# EAGLE board T5400_Barometer_Breakout-Panel-v10 (EAGLE 6.5.0), part 1 of 2
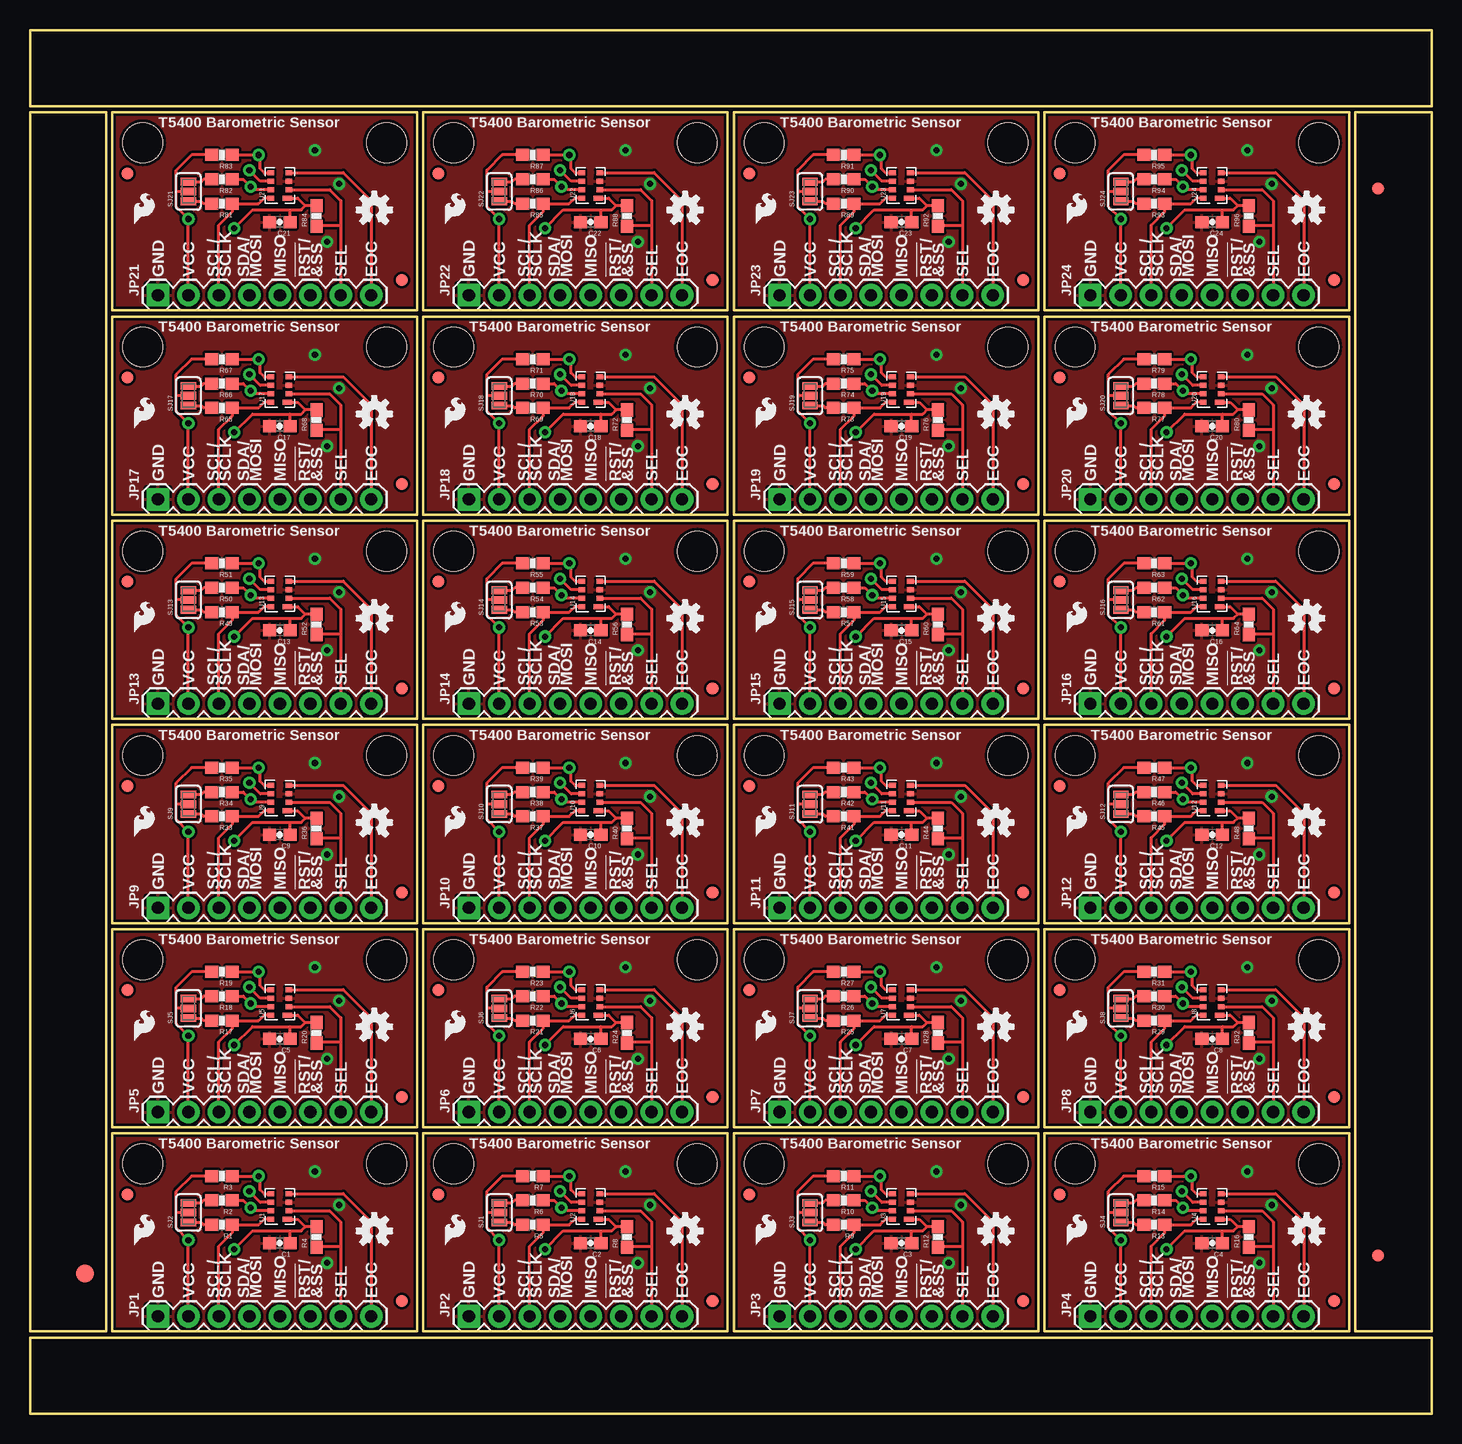
[diagram p0: board, top side]
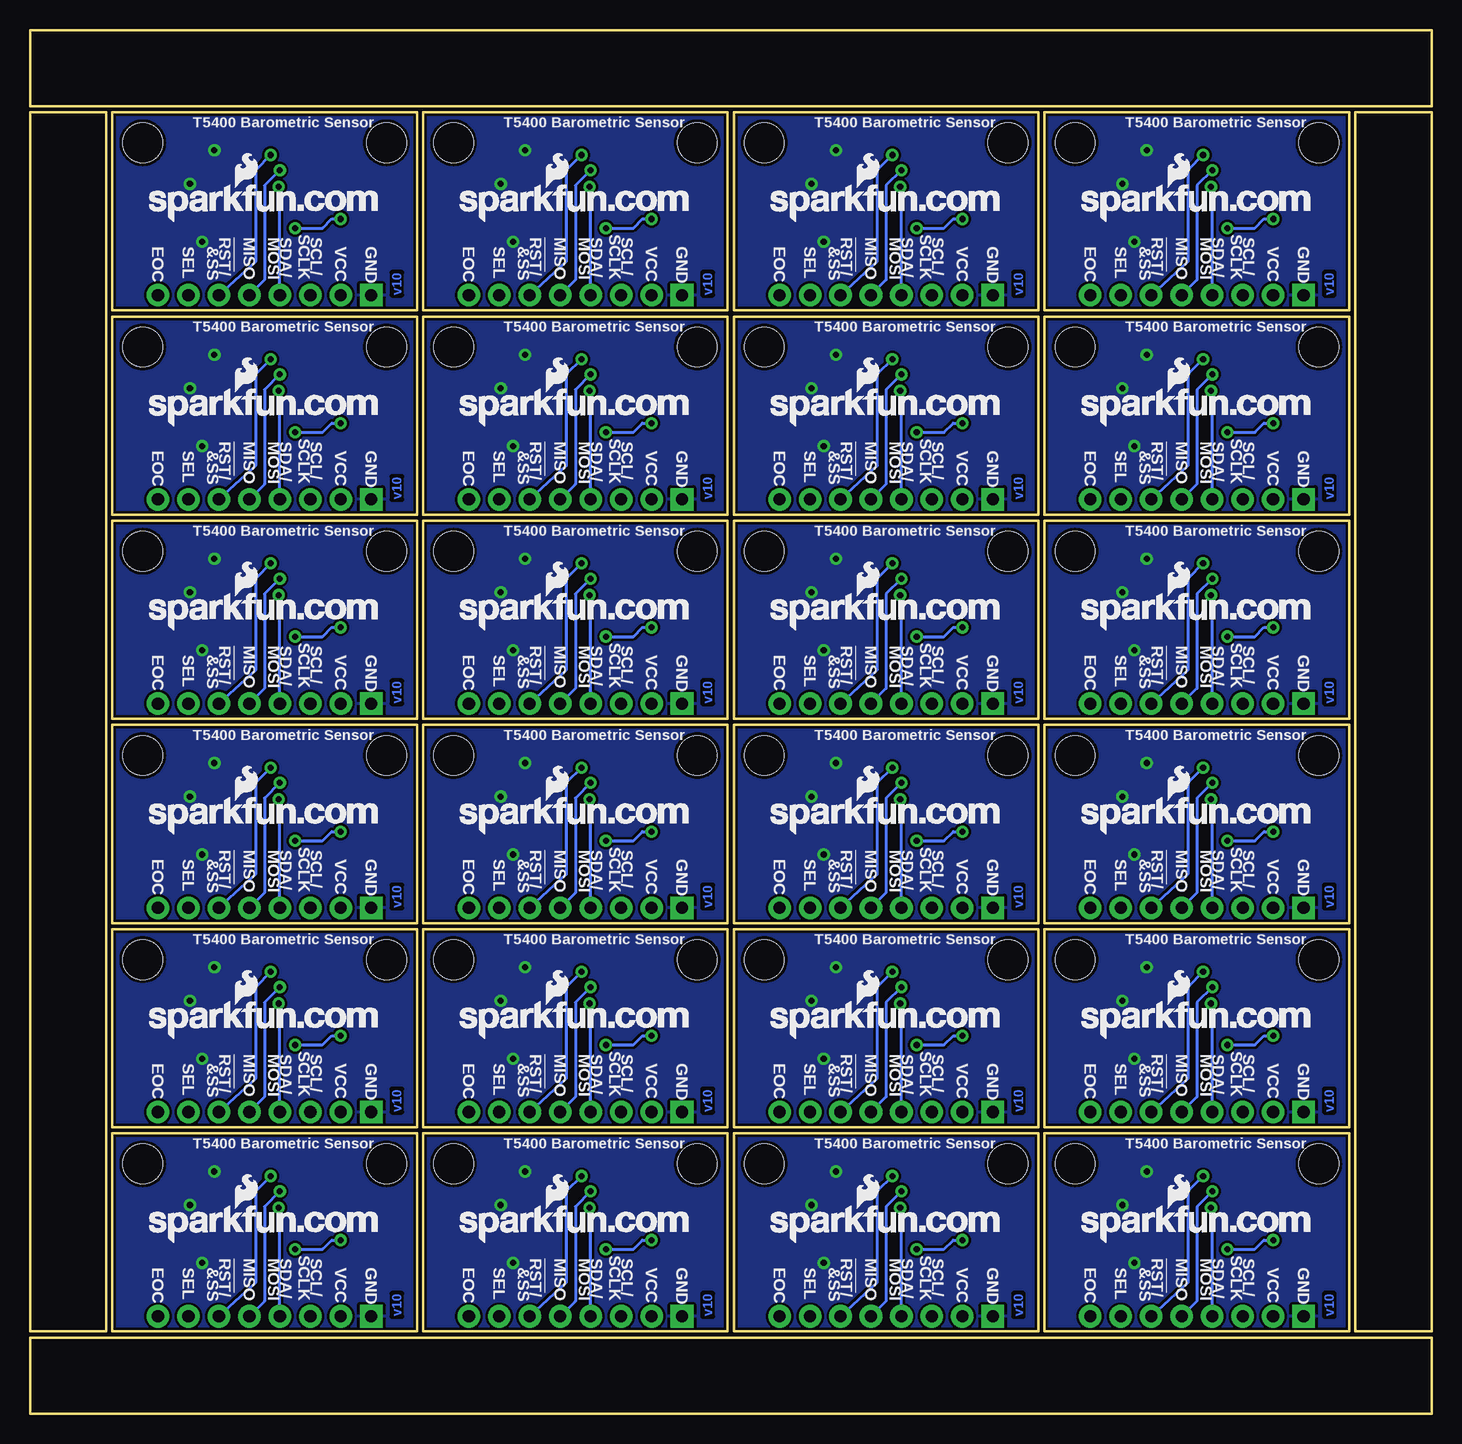
[diagram p1: board, bottom side, seen from below]

Size 116.84 x 115.32 mm. Coordinates in mm from the lower left corner, seen from the top.
Outline: 6.86,6.86 32.26,6.86 32.26,23.37 6.86,23.37 6.86,6.86
Outline: 32.77,6.86 58.17,6.86 58.17,23.37 32.77,23.37 32.77,6.86
Outline: 58.67,6.86 84.07,6.86 84.07,23.37 58.67,23.37 58.67,6.86
Outline: 84.58,6.86 109.98,6.86 109.98,23.37 84.58,23.37 84.58,6.86
Outline: 6.86,23.88 32.26,23.88 32.26,40.39 6.86,40.39 6.86,23.88
Outline: 32.77,23.88 58.17,23.88 58.17,40.39 32.77,40.39 32.77,23.88
Outline: 58.67,23.88 84.07,23.88 84.07,40.39 58.67,40.39 58.67,23.88
Outline: 84.58,23.88 109.98,23.88 109.98,40.39 84.58,40.39 84.58,23.88
Outline: 6.86,40.89 32.26,40.89 32.26,57.4 6.86,57.4 6.86,40.89
Outline: 32.77,40.89 58.17,40.89 58.17,57.4 32.77,57.4 32.77,40.89
Outline: 58.67,40.89 84.07,40.89 84.07,57.4 58.67,57.4 58.67,40.89
Outline: 84.58,40.89 109.98,40.89 109.98,57.4 84.58,57.4 84.58,40.89
Outline: 6.86,57.91 32.26,57.91 32.26,74.42 6.86,74.42 6.86,57.91
Outline: 32.77,57.91 58.17,57.91 58.17,74.42 32.77,74.42 32.77,57.91
Outline: 58.67,57.91 84.07,57.91 84.07,74.42 58.67,74.42 58.67,57.91
Outline: 84.58,57.91 109.98,57.91 109.98,74.42 84.58,74.42 84.58,57.91
Outline: 6.86,74.93 32.26,74.93 32.26,91.44 6.86,91.44 6.86,74.93
Outline: 32.77,74.93 58.17,74.93 58.17,91.44 32.77,91.44 32.77,74.93
Outline: 58.67,74.93 84.07,74.93 84.07,91.44 58.67,91.44 58.67,74.93
Outline: 84.58,74.93 109.98,74.93 109.98,91.44 84.58,91.44 84.58,74.93
Outline: 6.86,91.95 32.26,91.95 32.26,108.46 6.86,108.46 6.86,91.95
Outline: 32.77,91.95 58.17,91.95 58.17,108.46 32.77,108.46 32.77,91.95
Outline: 58.67,91.95 84.07,91.95 84.07,108.46 58.67,108.46 58.67,91.95
Outline: 84.58,91.95 109.98,91.95 109.98,108.46 84.58,108.46 84.58,91.95
Outline: 6.35,6.86 6.35,108.46 0,108.46 0,6.86 6.35,6.86
Outline: 0,0 116.84,0 116.84,6.35 0,6.35 0,0
Outline: 116.84,6.86 116.84,108.46 110.49,108.46 110.49,6.86 116.84,6.86
Outline: 116.84,115.32 0,115.32 0,108.97 116.84,108.97 116.84,115.32
Copper layers (1*16): Top 0.035mm / dielectric 1.5mm / Bottom 0.035mm
Design rules "default": minimum track width 7mil, minimum drill 15mil, track to track 8mil, track to pad 8mil, pad to pad 8mil, via to via 8mil, smd to smd 8mil, copper to edge 8mil, drill to drill 8mil, minimum pad ring 12mil, minimum via ring 10mil, stop-mask expansion 4mil, vias tented up to drill 20mil, thermal gap 10mil
tRestrict: area 20.6,15.7 to 20.8,16.5; area 20.6,16.5 to 21.1,17.3; area 46.5,15.7 to 46.7,16.5; area 46.5,16.5 to 47,17.3; area 72.4,15.7 to 72.6,16.5; area 72.4,16.5 to 72.9,17.3; area 98.3,15.7 to 98.6,16.5; area 98.3,16.5 to 98.8,17.3; area 20.6,32.8 to 20.8,33.5; area 20.6,33.5 to 21.1,34.3; area 46.5,32.8 to 46.7,33.5; area 46.5,33.5 to 47,34.3; area 72.4,32.8 to 72.6,33.5; area 72.4,33.5 to 72.9,34.3; area 98.3,32.8 to 98.6,33.5; area 98.3,33.5 to 98.8,34.3; area 20.6,49.8 to 20.8,50.5; area 20.6,50.5 to 21.1,51.3; area 46.5,49.8 to 46.7,50.5; area 46.5,50.5 to 47,51.3; area 72.4,49.8 to 72.6,50.5; area 72.4,50.5 to 72.9,51.3; area 98.3,49.8 to 98.6,50.5; area 98.3,50.5 to 98.8,51.3; area 20.6,66.8 to 20.8,67.6; area 20.6,67.6 to 21.1,68.3; area 46.5,66.8 to 46.7,67.6; area 46.5,67.6 to 47,68.3; area 72.4,66.8 to 72.6,67.6; area 72.4,67.6 to 72.9,68.3; area 98.3,66.8 to 98.6,67.6; area 98.3,67.6 to 98.8,68.3; area 20.6,83.8 to 20.8,84.6; area 20.6,84.6 to 21.1,85.3; area 46.5,83.8 to 46.7,84.6; area 46.5,84.6 to 47,85.3; area 72.4,83.8 to 72.6,84.6; area 72.4,84.6 to 72.9,85.3; area 98.3,83.8 to 98.6,84.6; area 98.3,84.6 to 98.8,85.3; area 20.6,100.8 to 20.8,101.6; area 20.6,101.6 to 21.1,102.4; area 46.5,100.8 to 46.7,101.6; area 46.5,101.6 to 47,102.4; area 72.4,100.8 to 72.6,101.6; area 72.4,101.6 to 72.9,102.4; area 98.3,100.8 to 98.6,101.6; area 98.3,101.6 to 98.8,102.4

## Footprints (pad centres in the part's own frame; a part is rotated, then mirrored left to right if it is on the bottom)
0603-CAP = smd 1.1 x 1: 1 -0.85,0; 2 0.85,0
FIDUCIAL-1.5X3 = smd 1.5 x 1.5: 1 0,0
FIDUCIAL-1X2 = smd 1 x 1: 1 0,0
1X08 = drill 1.016 pad 1.88 square: 1 0,0 | drill 1.016 pad 1.88: 2 2.54,0; 3 5.08,0; 4 7.62,0; 5 10.16,0; 6 12.7,0; 7 15.24,0; 8 17.78,0
0603-RES = smd 1.1 x 1: 1 -0.85,0; 2 0.85,0
SJ_3_PASTE1&2&3 = smd 0.635 x 1.27: 1 -0.813,0; 2 0,0; 3 0.813,0
STAND-OFF = hole 3.302: 0,0
T5400 = smd 0.42 x 0.8: 1 -1.065,-0.625 | smd 0.42 x 0.55: 2 -0.355,-0.75; 3 0.355,-0.75; 4 1.065,-0.75; 5 1.065,0.75; 6 0.355,0.75; 7 -0.355,0.75; 8 -1.065,0.75

## Placement (x,y rotation side)
C1  .1uF  [0603-CAP]  20.83,14.22 180 top
C2  .1uF  [0603-CAP]  46.74,14.22 180 top
C3  .1uF  [0603-CAP]  72.64,14.22 180 top
C4  .1uF  [0603-CAP]  98.55,14.22 180 top
C5  .1uF  [0603-CAP]  20.83,31.24 180 top
C6  .1uF  [0603-CAP]  46.74,31.24 180 top
C7  .1uF  [0603-CAP]  72.64,31.24 180 top
C8  .1uF  [0603-CAP]  98.55,31.24 180 top
C9  .1uF  [0603-CAP]  20.83,48.26 180 top
C10  .1uF  [0603-CAP]  46.74,48.26 180 top
C11  .1uF  [0603-CAP]  72.64,48.26 180 top
C12  .1uF  [0603-CAP]  98.55,48.26 180 top
C13  .1uF  [0603-CAP]  20.83,65.28 180 top
C14  .1uF  [0603-CAP]  46.74,65.28 180 top
C15  .1uF  [0603-CAP]  72.64,65.28 180 top
C16  .1uF  [0603-CAP]  98.55,65.28 180 top
C17  .1uF  [0603-CAP]  20.83,82.3 180 top
C18  .1uF  [0603-CAP]  46.74,82.3 180 top
C19  .1uF  [0603-CAP]  72.64,82.3 180 top
C20  .1uF  [0603-CAP]  98.55,82.3 180 top
C21  .1uF  [0603-CAP]  20.83,99.31 180 top
C22  .1uF  [0603-CAP]  46.74,99.31 180 top
C23  .1uF  [0603-CAP]  72.64,99.31 180 top
C24  .1uF  [0603-CAP]  98.55,99.31 180 top
E$1  [FIDUCIAL-1.5X3]  4.57,11.68 0 top
E$4  [FIDUCIAL-1X2]  112.39,13.21 0 top
E$5  [FIDUCIAL-1X2]  112.39,102.11 180 top
FID1  FIDUCIAL1X2  [FIDUCIAL-1X2]  8.13,18.29 0 top
FID2  FIDUCIAL1X2  [FIDUCIAL-1X2]  30.99,9.4 0 top
FID3  FIDUCIAL1X2  [FIDUCIAL-1X2]  34.04,18.29 0 top
FID4  FIDUCIAL1X2  [FIDUCIAL-1X2]  56.9,9.4 0 top
FID5  FIDUCIAL1X2  [FIDUCIAL-1X2]  59.94,18.29 0 top
FID6  FIDUCIAL1X2  [FIDUCIAL-1X2]  82.8,9.4 0 top
FID7  FIDUCIAL1X2  [FIDUCIAL-1X2]  85.85,18.29 0 top
FID8  FIDUCIAL1X2  [FIDUCIAL-1X2]  108.71,9.4 0 top
FID9  FIDUCIAL1X2  [FIDUCIAL-1X2]  8.13,35.31 0 top
FID10  FIDUCIAL1X2  [FIDUCIAL-1X2]  30.99,26.42 0 top
FID11  FIDUCIAL1X2  [FIDUCIAL-1X2]  34.04,35.31 0 top
FID12  FIDUCIAL1X2  [FIDUCIAL-1X2]  56.9,26.42 0 top
FID13  FIDUCIAL1X2  [FIDUCIAL-1X2]  59.94,35.31 0 top
FID14  FIDUCIAL1X2  [FIDUCIAL-1X2]  82.8,26.42 0 top
FID15  FIDUCIAL1X2  [FIDUCIAL-1X2]  85.85,35.31 0 top
FID16  FIDUCIAL1X2  [FIDUCIAL-1X2]  108.71,26.42 0 top
FID17  FIDUCIAL1X2  [FIDUCIAL-1X2]  8.13,52.32 0 top
FID18  FIDUCIAL1X2  [FIDUCIAL-1X2]  30.99,43.43 0 top
FID19  FIDUCIAL1X2  [FIDUCIAL-1X2]  34.04,52.32 0 top
FID20  FIDUCIAL1X2  [FIDUCIAL-1X2]  56.9,43.43 0 top
FID21  FIDUCIAL1X2  [FIDUCIAL-1X2]  59.94,52.32 0 top
FID22  FIDUCIAL1X2  [FIDUCIAL-1X2]  82.8,43.43 0 top
FID23  FIDUCIAL1X2  [FIDUCIAL-1X2]  85.85,52.32 0 top
FID24  FIDUCIAL1X2  [FIDUCIAL-1X2]  108.71,43.43 0 top
FID25  FIDUCIAL1X2  [FIDUCIAL-1X2]  8.13,69.34 0 top
FID26  FIDUCIAL1X2  [FIDUCIAL-1X2]  30.99,60.45 0 top
FID27  FIDUCIAL1X2  [FIDUCIAL-1X2]  34.04,69.34 0 top
FID28  FIDUCIAL1X2  [FIDUCIAL-1X2]  56.9,60.45 0 top
FID29  FIDUCIAL1X2  [FIDUCIAL-1X2]  59.94,69.34 0 top
FID30  FIDUCIAL1X2  [FIDUCIAL-1X2]  82.8,60.45 0 top
FID31  FIDUCIAL1X2  [FIDUCIAL-1X2]  85.85,69.34 0 top
FID32  FIDUCIAL1X2  [FIDUCIAL-1X2]  108.71,60.45 0 top
FID33  FIDUCIAL1X2  [FIDUCIAL-1X2]  8.13,86.36 0 top
FID34  FIDUCIAL1X2  [FIDUCIAL-1X2]  30.99,77.47 0 top
FID35  FIDUCIAL1X2  [FIDUCIAL-1X2]  34.04,86.36 0 top
FID36  FIDUCIAL1X2  [FIDUCIAL-1X2]  56.9,77.47 0 top
FID37  FIDUCIAL1X2  [FIDUCIAL-1X2]  59.94,86.36 0 top
FID38  FIDUCIAL1X2  [FIDUCIAL-1X2]  82.8,77.47 0 top
FID39  FIDUCIAL1X2  [FIDUCIAL-1X2]  85.85,86.36 0 top
FID40  FIDUCIAL1X2  [FIDUCIAL-1X2]  108.71,77.47 0 top
FID41  FIDUCIAL1X2  [FIDUCIAL-1X2]  8.13,103.38 0 top
FID42  FIDUCIAL1X2  [FIDUCIAL-1X2]  30.99,94.49 0 top
FID43  FIDUCIAL1X2  [FIDUCIAL-1X2]  34.04,103.38 0 top
FID44  FIDUCIAL1X2  [FIDUCIAL-1X2]  56.9,94.49 0 top
FID45  FIDUCIAL1X2  [FIDUCIAL-1X2]  59.94,103.38 0 top
FID46  FIDUCIAL1X2  [FIDUCIAL-1X2]  82.8,94.49 0 top
FID47  FIDUCIAL1X2  [FIDUCIAL-1X2]  85.85,103.38 0 top
FID48  FIDUCIAL1X2  [FIDUCIAL-1X2]  108.71,94.49 0 top
JP1  [1X08]  10.67,8.13 0 top
JP2  [1X08]  36.58,8.13 0 top
JP3  [1X08]  62.48,8.13 0 top
JP4  [1X08]  88.39,8.13 0 top
JP5  [1X08]  10.67,25.15 0 top
JP6  [1X08]  36.58,25.15 0 top
JP7  [1X08]  62.48,25.15 0 top
JP8  [1X08]  88.39,25.15 0 top
JP9  [1X08]  10.67,42.16 0 top
JP10  [1X08]  36.58,42.16 0 top
JP11  [1X08]  62.48,42.16 0 top
JP12  [1X08]  88.39,42.16 0 top
JP13  [1X08]  10.67,59.18 0 top
JP14  [1X08]  36.58,59.18 0 top
JP15  [1X08]  62.48,59.18 0 top
JP16  [1X08]  88.39,59.18 0 top
JP17  [1X08]  10.67,76.2 0 top
JP18  [1X08]  36.58,76.2 0 top
JP19  [1X08]  62.48,76.2 0 top
JP20  [1X08]  88.39,76.2 0 top
JP21  [1X08]  10.67,93.22 0 top
JP22  [1X08]  36.58,93.22 0 top
JP23  [1X08]  62.48,93.22 0 top
JP24  [1X08]  88.39,93.22 0 top
LOGO1  LOGO-SFENEW  [SFE-NEW-WEBLOGO]  29.21,14.22 0 bottom
LOGO2  OSHW-LOGOS  [OSHW-LOGO-S]  28.7,15.24 0 top
LOGO3  SFE_LOGO_FLAME.1_INCH  [SFE_LOGO_FLAME_.1]  8.38,13.72 0 top
LOGO4  OSHW-LOGOS  [OSHW-LOGO-S]  54.61,15.24 0 top
LOGO5  LOGO-SFENEW  [SFE-NEW-WEBLOGO]  55.12,14.22 0 bottom
LOGO6  SFE_LOGO_FLAME.1_INCH  [SFE_LOGO_FLAME_.1]  34.29,13.72 0 top
LOGO7  OSHW-LOGOS  [OSHW-LOGO-S]  80.52,15.24 0 top
LOGO8  LOGO-SFENEW  [SFE-NEW-WEBLOGO]  81.03,14.22 0 bottom
LOGO9  SFE_LOGO_FLAME.1_INCH  [SFE_LOGO_FLAME_.1]  60.2,13.72 0 top
LOGO10  OSHW-LOGOS  [OSHW-LOGO-S]  106.43,15.24 0 top
LOGO11  LOGO-SFENEW  [SFE-NEW-WEBLOGO]  106.93,14.22 0 bottom
LOGO12  SFE_LOGO_FLAME.1_INCH  [SFE_LOGO_FLAME_.1]  86.11,13.72 0 top
LOGO13  OSHW-LOGOS  [OSHW-LOGO-S]  28.7,32.26 0 top
LOGO14  LOGO-SFENEW  [SFE-NEW-WEBLOGO]  29.21,31.24 0 bottom
LOGO15  SFE_LOGO_FLAME.1_INCH  [SFE_LOGO_FLAME_.1]  8.38,30.73 0 top
LOGO16  OSHW-LOGOS  [OSHW-LOGO-S]  54.61,32.26 0 top
LOGO17  LOGO-SFENEW  [SFE-NEW-WEBLOGO]  55.12,31.24 0 bottom
LOGO18  SFE_LOGO_FLAME.1_INCH  [SFE_LOGO_FLAME_.1]  34.29,30.73 0 top
LOGO19  OSHW-LOGOS  [OSHW-LOGO-S]  80.52,32.26 0 top
LOGO20  LOGO-SFENEW  [SFE-NEW-WEBLOGO]  81.03,31.24 0 bottom
LOGO21  SFE_LOGO_FLAME.1_INCH  [SFE_LOGO_FLAME_.1]  60.2,30.73 0 top
LOGO22  OSHW-LOGOS  [OSHW-LOGO-S]  106.43,32.26 0 top
LOGO23  LOGO-SFENEW  [SFE-NEW-WEBLOGO]  106.93,31.24 0 bottom
LOGO24  SFE_LOGO_FLAME.1_INCH  [SFE_LOGO_FLAME_.1]  86.11,30.73 0 top
LOGO25  OSHW-LOGOS  [OSHW-LOGO-S]  28.7,49.28 0 top
LOGO26  LOGO-SFENEW  [SFE-NEW-WEBLOGO]  29.21,48.26 0 bottom
LOGO27  SFE_LOGO_FLAME.1_INCH  [SFE_LOGO_FLAME_.1]  8.38,47.75 0 top
LOGO28  OSHW-LOGOS  [OSHW-LOGO-S]  54.61,49.28 0 top
LOGO29  LOGO-SFENEW  [SFE-NEW-WEBLOGO]  55.12,48.26 0 bottom
LOGO30  SFE_LOGO_FLAME.1_INCH  [SFE_LOGO_FLAME_.1]  34.29,47.75 0 top
LOGO31  OSHW-LOGOS  [OSHW-LOGO-S]  80.52,49.28 0 top
LOGO32  LOGO-SFENEW  [SFE-NEW-WEBLOGO]  81.03,48.26 0 bottom
LOGO33  SFE_LOGO_FLAME.1_INCH  [SFE_LOGO_FLAME_.1]  60.2,47.75 0 top
LOGO34  OSHW-LOGOS  [OSHW-LOGO-S]  106.43,49.28 0 top
LOGO35  LOGO-SFENEW  [SFE-NEW-WEBLOGO]  106.93,48.26 0 bottom
LOGO36  SFE_LOGO_FLAME.1_INCH  [SFE_LOGO_FLAME_.1]  86.11,47.75 0 top
LOGO37  OSHW-LOGOS  [OSHW-LOGO-S]  28.7,66.29 0 top
LOGO38  LOGO-SFENEW  [SFE-NEW-WEBLOGO]  29.21,65.28 0 bottom
LOGO39  SFE_LOGO_FLAME.1_INCH  [SFE_LOGO_FLAME_.1]  8.38,64.77 0 top
LOGO40  OSHW-LOGOS  [OSHW-LOGO-S]  54.61,66.29 0 top
LOGO41  LOGO-SFENEW  [SFE-NEW-WEBLOGO]  55.12,65.28 0 bottom
LOGO42  SFE_LOGO_FLAME.1_INCH  [SFE_LOGO_FLAME_.1]  34.29,64.77 0 top
LOGO43  OSHW-LOGOS  [OSHW-LOGO-S]  80.52,66.29 0 top
LOGO44  LOGO-SFENEW  [SFE-NEW-WEBLOGO]  81.03,65.28 0 bottom
LOGO45  SFE_LOGO_FLAME.1_INCH  [SFE_LOGO_FLAME_.1]  60.2,64.77 0 top
LOGO46  OSHW-LOGOS  [OSHW-LOGO-S]  106.43,66.29 0 top
LOGO47  LOGO-SFENEW  [SFE-NEW-WEBLOGO]  106.93,65.28 0 bottom
LOGO48  SFE_LOGO_FLAME.1_INCH  [SFE_LOGO_FLAME_.1]  86.11,64.77 0 top
LOGO49  OSHW-LOGOS  [OSHW-LOGO-S]  28.7,83.31 0 top
LOGO50  LOGO-SFENEW  [SFE-NEW-WEBLOGO]  29.21,82.3 0 bottom
LOGO51  SFE_LOGO_FLAME.1_INCH  [SFE_LOGO_FLAME_.1]  8.38,81.79 0 top
LOGO52  OSHW-LOGOS  [OSHW-LOGO-S]  54.61,83.31 0 top
LOGO53  LOGO-SFENEW  [SFE-NEW-WEBLOGO]  55.12,82.3 0 bottom
LOGO54  SFE_LOGO_FLAME.1_INCH  [SFE_LOGO_FLAME_.1]  34.29,81.79 0 top
LOGO55  OSHW-LOGOS  [OSHW-LOGO-S]  80.52,83.31 0 top
LOGO56  LOGO-SFENEW  [SFE-NEW-WEBLOGO]  81.03,82.3 0 bottom
LOGO57  SFE_LOGO_FLAME.1_INCH  [SFE_LOGO_FLAME_.1]  60.2,81.79 0 top
LOGO58  OSHW-LOGOS  [OSHW-LOGO-S]  106.43,83.31 0 top
LOGO59  LOGO-SFENEW  [SFE-NEW-WEBLOGO]  106.93,82.3 0 bottom
LOGO60  SFE_LOGO_FLAME.1_INCH  [SFE_LOGO_FLAME_.1]  86.11,81.79 0 top
LOGO61  OSHW-LOGOS  [OSHW-LOGO-S]  28.7,100.33 0 top
LOGO62  LOGO-SFENEW  [SFE-NEW-WEBLOGO]  29.21,99.31 0 bottom
LOGO63  SFE_LOGO_FLAME.1_INCH  [SFE_LOGO_FLAME_.1]  8.38,98.81 0 top
LOGO64  OSHW-LOGOS  [OSHW-LOGO-S]  54.61,100.33 0 top
LOGO65  LOGO-SFENEW  [SFE-NEW-WEBLOGO]  55.12,99.31 0 bottom
LOGO66  SFE_LOGO_FLAME.1_INCH  [SFE_LOGO_FLAME_.1]  34.29,98.81 0 top
LOGO67  OSHW-LOGOS  [OSHW-LOGO-S]  80.52,100.33 0 top
LOGO68  LOGO-SFENEW  [SFE-NEW-WEBLOGO]  81.03,99.31 0 bottom
LOGO69  SFE_LOGO_FLAME.1_INCH  [SFE_LOGO_FLAME_.1]  60.2,98.81 0 top
LOGO70  OSHW-LOGOS  [OSHW-LOGO-S]  106.43,100.33 0 top
LOGO71  LOGO-SFENEW  [SFE-NEW-WEBLOGO]  106.93,99.31 0 bottom
LOGO72  SFE_LOGO_FLAME.1_INCH  [SFE_LOGO_FLAME_.1]  86.11,98.81 0 top
R1  4.7k  [0603-RES]  16,15.75 180 top
R2  4.7k  [0603-RES]  16,17.78 180 top
R3  10k  [0603-RES]  16,19.81 180 top
R4  10k  [0603-RES]  23.88,14.73 90 top
R5  4.7k  [0603-RES]  41.91,15.75 180 top
R6  4.7k  [0603-RES]  41.91,17.78 180 top
R7  10k  [0603-RES]  41.91,19.81 180 top
R8  10k  [0603-RES]  49.78,14.73 90 top
R9  4.7k  [0603-RES]  67.82,15.75 180 top
R10  4.7k  [0603-RES]  67.82,17.78 180 top
R11  10k  [0603-RES]  67.82,19.81 180 top
R12  10k  [0603-RES]  75.69,14.73 90 top
R13  4.7k  [0603-RES]  93.73,15.75 180 top
R14  4.7k  [0603-RES]  93.73,17.78 180 top
R15  10k  [0603-RES]  93.73,19.81 180 top
R16  10k  [0603-RES]  101.6,14.73 90 top
R17  4.7k  [0603-RES]  16,32.77 180 top
R18  4.7k  [0603-RES]  16,34.8 180 top
R19  10k  [0603-RES]  16,36.83 180 top
R20  10k  [0603-RES]  23.88,31.75 90 top
R21  4.7k  [0603-RES]  41.91,32.77 180 top
R22  4.7k  [0603-RES]  41.91,34.8 180 top
R23  10k  [0603-RES]  41.91,36.83 180 top
R24  10k  [0603-RES]  49.78,31.75 90 top
R25  4.7k  [0603-RES]  67.82,32.77 180 top
R26  4.7k  [0603-RES]  67.82,34.8 180 top
R27  10k  [0603-RES]  67.82,36.83 180 top
R28  10k  [0603-RES]  75.69,31.75 90 top
R29  4.7k  [0603-RES]  93.73,32.77 180 top
R30  4.7k  [0603-RES]  93.73,34.8 180 top
R31  10k  [0603-RES]  93.73,36.83 180 top
R32  10k  [0603-RES]  101.6,31.75 90 top
R33  4.7k  [0603-RES]  16,49.78 180 top
R34  4.7k  [0603-RES]  16,51.82 180 top
R35  10k  [0603-RES]  16,53.85 180 top
R36  10k  [0603-RES]  23.88,48.77 90 top
R37  4.7k  [0603-RES]  41.91,49.78 180 top
R38  4.7k  [0603-RES]  41.91,51.82 180 top
R39  10k  [0603-RES]  41.91,53.85 180 top
R40  10k  [0603-RES]  49.78,48.77 90 top
R41  4.7k  [0603-RES]  67.82,49.78 180 top
R42  4.7k  [0603-RES]  67.82,51.82 180 top
R43  10k  [0603-RES]  67.82,53.85 180 top
R44  10k  [0603-RES]  75.69,48.77 90 top
R45  4.7k  [0603-RES]  93.73,49.78 180 top
R46  4.7k  [0603-RES]  93.73,51.82 180 top
R47  10k  [0603-RES]  93.73,53.85 180 top
R48  10k  [0603-RES]  101.6,48.77 90 top
R49  4.7k  [0603-RES]  16,66.8 180 top
R50  4.7k  [0603-RES]  16,68.83 180 top
R51  10k  [0603-RES]  16,70.87 180 top
R52  10k  [0603-RES]  23.88,65.79 90 top
R53  4.7k  [0603-RES]  41.91,66.8 180 top
R54  4.7k  [0603-RES]  41.91,68.83 180 top
R55  10k  [0603-RES]  41.91,70.87 180 top
R56  10k  [0603-RES]  49.78,65.79 90 top
R57  4.7k  [0603-RES]  67.82,66.8 180 top
R58  4.7k  [0603-RES]  67.82,68.83 180 top
R59  10k  [0603-RES]  67.82,70.87 180 top
R60  10k  [0603-RES]  75.69,65.79 90 top
R61  4.7k  [0603-RES]  93.73,66.8 180 top
R62  4.7k  [0603-RES]  93.73,68.83 180 top
R63  10k  [0603-RES]  93.73,70.87 180 top
R64  10k  [0603-RES]  101.6,65.79 90 top
R65  4.7k  [0603-RES]  16,83.82 180 top
R66  4.7k  [0603-RES]  16,85.85 180 top
R67  10k  [0603-RES]  16,87.88 180 top
R68  10k  [0603-RES]  23.88,82.8 90 top
R69  4.7k  [0603-RES]  41.91,83.82 180 top
R70  4.7k  [0603-RES]  41.91,85.85 180 top
R71  10k  [0603-RES]  41.91,87.88 180 top
R72  10k  [0603-RES]  49.78,82.8 90 top
R73  4.7k  [0603-RES]  67.82,83.82 180 top
R74  4.7k  [0603-RES]  67.82,85.85 180 top
R75  10k  [0603-RES]  67.82,87.88 180 top
R76  10k  [0603-RES]  75.69,82.8 90 top
R77  4.7k  [0603-RES]  93.73,83.82 180 top
R78  4.7k  [0603-RES]  93.73,85.85 180 top
R79  10k  [0603-RES]  93.73,87.88 180 top
R80  10k  [0603-RES]  101.6,82.8 90 top
R81  4.7k  [0603-RES]  16,100.84 180 top
R82  4.7k  [0603-RES]  16,102.87 180 top
R83  10k  [0603-RES]  16,104.9 180 top
R84  10k  [0603-RES]  23.88,99.82 90 top
R85  4.7k  [0603-RES]  41.91,100.84 180 top
R86  4.7k  [0603-RES]  41.91,102.87 180 top
R87  10k  [0603-RES]  41.91,104.9 180 top
R88  10k  [0603-RES]  49.78,99.82 90 top
R89  4.7k  [0603-RES]  67.82,100.84 180 top
R90  4.7k  [0603-RES]  67.82,102.87 180 top
R91  10k  [0603-RES]  67.82,104.9 180 top
R92  10k  [0603-RES]  75.69,99.82 90 top
R93  4.7k  [0603-RES]  93.73,100.84 180 top
R94  4.7k  [0603-RES]  93.73,102.87 180 top
R95  10k  [0603-RES]  93.73,104.9 180 top
R96  10k  [0603-RES]  101.6,99.82 90 top
SJ1  [SJ_3_PASTE1&2&3]  39.12,16.76 90 top
SJ2  [SJ_3_PASTE1&2&3]  13.21,16.76 90 top
SJ3  [SJ_3_PASTE1&2&3]  65.02,16.76 90 top
SJ4  [SJ_3_PASTE1&2&3]  90.93,16.76 90 top
SJ5  [SJ_3_PASTE1&2&3]  13.21,33.78 90 top
SJ6  [SJ_3_PASTE1&2&3]  39.12,33.78 90 top
SJ7  [SJ_3_PASTE1&2&3]  65.02,33.78 90 top
SJ8  [SJ_3_PASTE1&2&3]  90.93,33.78 90 top
SJ9  [SJ_3_PASTE1&2&3]  13.21,50.8 90 top
SJ10  [SJ_3_PASTE1&2&3]  39.12,50.8 90 top
SJ11  [SJ_3_PASTE1&2&3]  65.02,50.8 90 top
SJ12  [SJ_3_PASTE1&2&3]  90.93,50.8 90 top
SJ13  [SJ_3_PASTE1&2&3]  13.21,67.82 90 top
SJ14  [SJ_3_PASTE1&2&3]  39.12,67.82 90 top
SJ15  [SJ_3_PASTE1&2&3]  65.02,67.82 90 top
SJ16  [SJ_3_PASTE1&2&3]  90.93,67.82 90 top
SJ17  [SJ_3_PASTE1&2&3]  13.21,84.84 90 top
SJ18  [SJ_3_PASTE1&2&3]  39.12,84.84 90 top
SJ19  [SJ_3_PASTE1&2&3]  65.02,84.84 90 top
SJ20  [SJ_3_PASTE1&2&3]  90.93,84.84 90 top
SJ21  [SJ_3_PASTE1&2&3]  13.21,101.85 90 top
SJ22  [SJ_3_PASTE1&2&3]  39.12,101.85 90 top
SJ23  [SJ_3_PASTE1&2&3]  65.02,101.85 90 top
SJ24  [SJ_3_PASTE1&2&3]  90.93,101.85 90 top
STANDOFF1  STAND-OFF  [STAND-OFF]  9.4,20.83 0 top
STANDOFF2  STAND-OFF  [STAND-OFF]  29.72,20.83 0 top
STANDOFF3  STAND-OFF  [STAND-OFF]  35.31,20.83 0 top
STANDOFF4  STAND-OFF  [STAND-OFF]  55.63,20.83 0 top
STANDOFF5  STAND-OFF  [STAND-OFF]  61.21,20.83 0 top
STANDOFF6  STAND-OFF  [STAND-OFF]  81.53,20.83 0 top
STANDOFF7  STAND-OFF  [STAND-OFF]  87.12,20.83 0 top
STANDOFF8  STAND-OFF  [STAND-OFF]  107.44,20.83 0 top
STANDOFF9  STAND-OFF  [STAND-OFF]  9.4,37.85 0 top
STANDOFF10  STAND-OFF  [STAND-OFF]  29.72,37.85 0 top
STANDOFF11  STAND-OFF  [STAND-OFF]  35.31,37.85 0 top
STANDOFF12  STAND-OFF  [STAND-OFF]  55.63,37.85 0 top
STANDOFF13  STAND-OFF  [STAND-OFF]  61.21,37.85 0 top
STANDOFF14  STAND-OFF  [STAND-OFF]  81.53,37.85 0 top
STANDOFF15  STAND-OFF  [STAND-OFF]  87.12,37.85 0 top
STANDOFF16  STAND-OFF  [STAND-OFF]  107.44,37.85 0 top
STANDOFF17  STAND-OFF  [STAND-OFF]  9.4,54.86 0 top
STANDOFF18  STAND-OFF  [STAND-OFF]  29.72,54.86 0 top
STANDOFF19  STAND-OFF  [STAND-OFF]  35.31,54.86 0 top
STANDOFF20  STAND-OFF  [STAND-OFF]  55.63,54.86 0 top
STANDOFF21  STAND-OFF  [STAND-OFF]  61.21,54.86 0 top
STANDOFF22  STAND-OFF  [STAND-OFF]  81.53,54.86 0 top
STANDOFF23  STAND-OFF  [STAND-OFF]  87.12,54.86 0 top
STANDOFF24  STAND-OFF  [STAND-OFF]  107.44,54.86 0 top
STANDOFF25  STAND-OFF  [STAND-OFF]  9.4,71.88 0 top
STANDOFF26  STAND-OFF  [STAND-OFF]  29.72,71.88 0 top
STANDOFF27  STAND-OFF  [STAND-OFF]  35.31,71.88 0 top
STANDOFF28  STAND-OFF  [STAND-OFF]  55.63,71.88 0 top
STANDOFF29  STAND-OFF  [STAND-OFF]  61.21,71.88 0 top
STANDOFF30  STAND-OFF  [STAND-OFF]  81.53,71.88 0 top
STANDOFF31  STAND-OFF  [STAND-OFF]  87.12,71.88 0 top
STANDOFF32  STAND-OFF  [STAND-OFF]  107.44,71.88 0 top
STANDOFF33  STAND-OFF  [STAND-OFF]  9.4,88.9 0 top
STANDOFF34  STAND-OFF  [STAND-OFF]  29.72,88.9 0 top
STANDOFF35  STAND-OFF  [STAND-OFF]  35.31,88.9 0 top
STANDOFF36  STAND-OFF  [STAND-OFF]  55.63,88.9 0 top
STANDOFF37  STAND-OFF  [STAND-OFF]  61.21,88.9 0 top
STANDOFF38  STAND-OFF  [STAND-OFF]  81.53,88.9 0 top
STANDOFF39  STAND-OFF  [STAND-OFF]  87.12,88.9 0 top
STANDOFF40  STAND-OFF  [STAND-OFF]  107.44,88.9 0 top
STANDOFF41  STAND-OFF  [STAND-OFF]  9.4,105.92 0 top
STANDOFF42  STAND-OFF  [STAND-OFF]  29.72,105.92 0 top
STANDOFF43  STAND-OFF  [STAND-OFF]  35.31,105.92 0 top
STANDOFF44  STAND-OFF  [STAND-OFF]  55.63,105.92 0 top
STANDOFF45  STAND-OFF  [STAND-OFF]  61.21,105.92 0 top
STANDOFF46  STAND-OFF  [STAND-OFF]  81.53,105.92 0 top
STANDOFF47  STAND-OFF  [STAND-OFF]  87.12,105.92 0 top
STANDOFF48  STAND-OFF  [STAND-OFF]  107.44,105.92 0 top
U1  T5400  [T5400]  20.83,17.27 90 top
U2  T5400  [T5400]  46.74,17.27 90 top
U3  T5400  [T5400]  72.64,17.27 90 top
U4  T5400  [T5400]  98.55,17.27 90 top
U5  T5400  [T5400]  20.83,34.29 90 top
U6  T5400  [T5400]  46.74,34.29 90 top
U7  T5400  [T5400]  72.64,34.29 90 top
U8  T5400  [T5400]  98.55,34.29 90 top
U9  T5400  [T5400]  20.83,51.31 90 top
U10  T5400  [T5400]  46.74,51.31 90 top
U11  T5400  [T5400]  72.64,51.31 90 top
U12  T5400  [T5400]  98.55,51.31 90 top
U13  T5400  [T5400]  20.83,68.33 90 top
U14  T5400  [T5400]  46.74,68.33 90 top
U15  T5400  [T5400]  72.64,68.33 90 top
U16  T5400  [T5400]  98.55,68.33 90 top
U17  T5400  [T5400]  20.83,85.34 90 top
U18  T5400  [T5400]  46.74,85.34 90 top
U19  T5400  [T5400]  72.64,85.34 90 top
U20  T5400  [T5400]  98.55,85.34 90 top
U21  T5400  [T5400]  20.83,102.36 90 top
U22  T5400  [T5400]  46.74,102.36 90 top
U23  T5400  [T5400]  72.64,102.36 90 top
U24  T5400  [T5400]  98.55,102.36 90 top

## Library data of the parts
C1-C24 = SparkFun-Capacitors; PROD_ID: CAP-08604
E$1 E$4 E$5 FID1-FID48 LOGO1-LOGO72 = SparkFun-Aesthetics
JP1-JP24 = SparkFun-Connectors
R1-R96 SJ1-SJ24 = SparkFun-Passives
STANDOFF1-STANDOFF48 = SparkFun-Electromechanical
U1-U24 = T5400

## Nets
!RST!/&SS: JP1.6 R3.1 U1.5
!RST!/&SS1: JP2.6 R7.1 U2.5
!RST!/&SS2: JP3.6 R11.1 U3.5
!RST!/&SS3: JP4.6 R15.1 U4.5
!RST!/&SS4: JP5.6 R19.1 U5.5
!RST!/&SS5: JP6.6 R23.1 U6.5
!RST!/&SS6: JP7.6 R27.1 U7.5
!RST!/&SS7: JP8.6 R31.1 U8.5
!RST!/&SS8: JP9.6 R35.1 U9.5
!RST!/&SS9: JP10.6 R39.1 U10.5
!RST!/&SS10: JP11.6 R43.1 U11.5
!RST!/&SS11: JP12.6 R47.1 U12.5
!RST!/&SS12: JP13.6 R51.1 U13.5
!RST!/&SS13: JP14.6 R55.1 U14.5
!RST!/&SS14: JP15.6 R59.1 U15.5
!RST!/&SS15: JP16.6 R63.1 U16.5
!RST!/&SS16: JP17.6 R67.1 U17.5
!RST!/&SS17: JP18.6 R71.1 U18.5
!RST!/&SS18: JP19.6 R75.1 U19.5
!RST!/&SS19: JP20.6 R79.1 U20.5
!RST!/&SS20: JP21.6 R83.1 U21.5
!RST!/&SS21: JP22.6 R87.1 U22.5
!RST!/&SS22: JP23.6 R91.1 U23.5
!RST!/&SS23: JP24.6 R95.1 U24.5
EOC: JP1.8 U1.4
EOC1: JP2.8 U2.4
EOC2: JP3.8 U3.4
EOC3: JP4.8 U4.4
EOC4: JP5.8 U5.4
EOC5: JP6.8 U6.4
EOC6: JP7.8 U7.4
EOC7: JP8.8 U8.4
EOC8: JP9.8 U9.4
EOC9: JP10.8 U10.4
EOC10: JP11.8 U11.4
EOC11: JP12.8 U12.4
EOC12: JP13.8 U13.4
EOC13: JP14.8 U14.4
EOC14: JP15.8 U15.4
EOC15: JP16.8 U16.4
EOC16: JP17.8 U17.4
EOC17: JP18.8 U18.4
EOC18: JP19.8 U19.4
EOC19: JP20.8 U20.4
EOC20: JP21.8 U21.4
EOC21: JP22.8 U22.4
EOC22: JP23.8 U23.4
EOC23: JP24.8 U24.4
GND: C1.2 JP1.1 U1.3
GND1: C2.2 JP2.1 U2.3
GND2: C3.2 JP3.1 U3.3
GND3: C4.2 JP4.1 U4.3
GND4: C5.2 JP5.1 U5.3
GND5: C6.2 JP6.1 U6.3
GND6: C7.2 JP7.1 U7.3
GND7: C8.2 JP8.1 U8.3
GND8: C9.2 JP9.1 U9.3
GND9: C10.2 JP10.1 U10.3
GND10: C11.2 JP11.1 U11.3
GND11: C12.2 JP12.1 U12.3
GND12: C13.2 JP13.1 U13.3
GND13: C14.2 JP14.1 U14.3
GND14: C15.2 JP15.1 U15.3
GND15: C16.2 JP16.1 U16.3
GND16: C17.2 JP17.1 U17.3
GND17: C18.2 JP18.1 U18.3
GND18: C19.2 JP19.1 U19.3
GND19: C20.2 JP20.1 U20.3
GND20: C21.2 JP21.1 U21.3
GND21: C22.2 JP22.1 U22.3
GND22: C23.2 JP23.1 U23.3
GND23: C24.2 JP24.1 U24.3
MISO: JP1.5 U1.6
MISO1: JP2.5 U2.6
MISO2: JP3.5 U3.6
MISO3: JP4.5 U4.6
MISO4: JP5.5 U5.6
MISO5: JP6.5 U6.6
MISO6: JP7.5 U7.6
MISO7: JP8.5 U8.6
MISO8: JP9.5 U9.6
MISO9: JP10.5 U10.6
MISO10: JP11.5 U11.6
MISO11: JP12.5 U12.6
MISO12: JP13.5 U13.6
MISO13: JP14.5 U14.6
MISO14: JP15.5 U15.6
MISO15: JP16.5 U16.6
MISO16: JP17.5 U17.6
MISO17: JP18.5 U18.6
MISO18: JP19.5 U19.6
MISO19: JP20.5 U20.6
MISO20: JP21.5 U21.6
MISO21: JP22.5 U22.6
MISO22: JP23.5 U23.6
MISO23: JP24.5 U24.6
N$1: R2.2 SJ2.3
N$2: R1.2 SJ2.1
N$3: R6.2 SJ1.3
N$4: R5.2 SJ1.1
N$5: R10.2 SJ3.3
N$6: R9.2 SJ3.1
N$7: R14.2 SJ4.3
N$8: R13.2 SJ4.1
N$9: R18.2 SJ5.3
N$10: R17.2 SJ5.1
N$11: R22.2 SJ6.3
N$12: R21.2 SJ6.1
N$13: R26.2 SJ7.3
N$14: R25.2 SJ7.1
N$15: R30.2 SJ8.3
N$16: R29.2 SJ8.1
N$17: R34.2 SJ9.3
N$18: R33.2 SJ9.1
N$19: R38.2 SJ10.3
N$20: R37.2 SJ10.1
N$21: R42.2 SJ11.3
N$22: R41.2 SJ11.1
N$23: R46.2 SJ12.3
N$24: R45.2 SJ12.1
N$25: R50.2 SJ13.3
N$26: R49.2 SJ13.1
N$27: R54.2 SJ14.3
N$28: R53.2 SJ14.1
N$29: R58.2 SJ15.3
N$30: R57.2 SJ15.1
N$31: R62.2 SJ16.3
N$32: R61.2 SJ16.1
N$33: R66.2 SJ17.3
N$34: R65.2 SJ17.1
N$35: R70.2 SJ18.3
N$36: R69.2 SJ18.1
N$37: R74.2 SJ19.3
N$38: R73.2 SJ19.1
N$39: R78.2 SJ20.3
N$40: R77.2 SJ20.1
N$41: R82.2 SJ21.3
N$42: R81.2 SJ21.1
N$43: R86.2 SJ22.3
N$44: R85.2 SJ22.1
N$45: R90.2 SJ23.3
N$46: R89.2 SJ23.1
N$47: R94.2 SJ24.3
N$48: R93.2 SJ24.1
SCL/SCLK: JP1.3 R1.1 U1.8
SCL/SCLK1: JP2.3 R5.1 U2.8
SCL/SCLK2: JP3.3 R9.1 U3.8
SCL/SCLK3: JP4.3 R13.1 U4.8
SCL/SCLK4: JP5.3 R17.1 U5.8
SCL/SCLK5: JP6.3 R21.1 U6.8
SCL/SCLK6: JP7.3 R25.1 U7.8
SCL/SCLK7: JP8.3 R29.1 U8.8
SCL/SCLK8: JP9.3 R33.1 U9.8
SCL/SCLK9: JP10.3 R37.1 U10.8
SCL/SCLK10: JP11.3 R41.1 U11.8
SCL/SCLK11: JP12.3 R45.1 U12.8
SCL/SCLK12: JP13.3 R49.1 U13.8
SCL/SCLK13: JP14.3 R53.1 U14.8
SCL/SCLK14: JP15.3 R57.1 U15.8
SCL/SCLK15: JP16.3 R61.1 U16.8
SCL/SCLK16: JP17.3 R65.1 U17.8
SCL/SCLK17: JP18.3 R69.1 U18.8
SCL/SCLK18: JP19.3 R73.1 U19.8
SCL/SCLK19: JP20.3 R77.1 U20.8
SCL/SCLK20: JP21.3 R81.1 U21.8
SCL/SCLK21: JP22.3 R85.1 U22.8
SCL/SCLK22: JP23.3 R89.1 U23.8
SCL/SCLK23: JP24.3 R93.1 U24.8
SDA/MOSI: JP1.4 R2.1 U1.7
SDA/MOSI1: JP2.4 R6.1 U2.7
SDA/MOSI2: JP3.4 R10.1 U3.7
SDA/MOSI3: JP4.4 R14.1 U4.7
SDA/MOSI4: JP5.4 R18.1 U5.7
SDA/MOSI5: JP6.4 R22.1 U6.7
SDA/MOSI6: JP7.4 R26.1 U7.7
SDA/MOSI7: JP8.4 R30.1 U8.7
SDA/MOSI8: JP9.4 R34.1 U9.7
SDA/MOSI9: JP10.4 R38.1 U10.7
SDA/MOSI10: JP11.4 R42.1 U11.7
SDA/MOSI11: JP12.4 R46.1 U12.7
SDA/MOSI12: JP13.4 R50.1 U13.7
SDA/MOSI13: JP14.4 R54.1 U14.7
SDA/MOSI14: JP15.4 R58.1 U15.7
SDA/MOSI15: JP16.4 R62.1 U16.7
SDA/MOSI16: JP17.4 R66.1 U17.7
SDA/MOSI17: JP18.4 R70.1 U18.7
SDA/MOSI18: JP19.4 R74.1 U19.7
SDA/MOSI19: JP20.4 R78.1 U20.7
SDA/MOSI20: JP21.4 R82.1 U21.7
SDA/MOSI21: JP22.4 R86.1 U22.7
SDA/MOSI22: JP23.4 R90.1 U23.7
SDA/MOSI23: JP24.4 R94.1 U24.7
SEL: JP1.7 R4.1 U1.2
SEL1: JP2.7 R8.1 U2.2
SEL2: JP3.7 R12.1 U3.2
SEL3: JP4.7 R16.1 U4.2
SEL4: JP5.7 R20.1 U5.2
SEL5: JP6.7 R24.1 U6.2
SEL6: JP7.7 R28.1 U7.2
SEL7: JP8.7 R32.1 U8.2
SEL8: JP9.7 R36.1 U9.2
SEL9: JP10.7 R40.1 U10.2
SEL10: JP11.7 R44.1 U11.2
SEL11: JP12.7 R48.1 U12.2
SEL12: JP13.7 R52.1 U13.2
SEL13: JP14.7 R56.1 U14.2
SEL14: JP15.7 R60.1 U15.2
SEL15: JP16.7 R64.1 U16.2
SEL16: JP17.7 R68.1 U17.2
SEL17: JP18.7 R72.1 U18.2
SEL18: JP19.7 R76.1 U19.2
SEL19: JP20.7 R80.1 U20.2
SEL20: JP21.7 R84.1 U21.2
SEL21: JP22.7 R88.1 U22.2
SEL22: JP23.7 R92.1 U23.2
SEL23: JP24.7 R96.1 U24.2
VCC: C1.1 JP1.2 R3.2 R4.2 SJ2.2 U1.1
VCC1: C2.1 JP2.2 R7.2 R8.2 SJ1.2 U2.1
VCC2: C3.1 JP3.2 R11.2 R12.2 SJ3.2 U3.1
VCC3: C4.1 JP4.2 R15.2 R16.2 SJ4.2 U4.1
VCC4: C5.1 JP5.2 R19.2 R20.2 SJ5.2 U5.1
VCC5: C6.1 JP6.2 R23.2 R24.2 SJ6.2 U6.1
VCC6: C7.1 JP7.2 R27.2 R28.2 SJ7.2 U7.1
VCC7: C8.1 JP8.2 R31.2 R32.2 SJ8.2 U8.1
VCC8: C9.1 JP9.2 R35.2 R36.2 SJ9.2 U9.1
VCC9: C10.1 JP10.2 R39.2 R40.2 SJ10.2 U10.1
VCC10: C11.1 JP11.2 R43.2 R44.2 SJ11.2 U11.1
VCC11: C12.1 JP12.2 R47.2 R48.2 SJ12.2 U12.1
VCC12: C13.1 JP13.2 R51.2 R52.2 SJ13.2 U13.1
VCC13: C14.1 JP14.2 R55.2 R56.2 SJ14.2 U14.1
VCC14: C15.1 JP15.2 R59.2 R60.2 SJ15.2 U15.1
VCC15: C16.1 JP16.2 R63.2 R64.2 SJ16.2 U16.1
VCC16: C17.1 JP17.2 R67.2 R68.2 SJ17.2 U17.1
VCC17: C18.1 JP18.2 R71.2 R72.2 SJ18.2 U18.1
VCC18: C19.1 JP19.2 R75.2 R76.2 SJ19.2 U19.1
VCC19: C20.1 JP20.2 R79.2 R80.2 SJ20.2 U20.1
VCC20: C21.1 JP21.2 R83.2 R84.2 SJ21.2 U21.1
VCC21: C22.1 JP22.2 R87.2 R88.2 SJ22.2 U22.1
VCC22: C23.1 JP23.2 R91.2 R92.2 SJ23.2 U23.1
VCC23: C24.1 JP24.2 R95.2 R96.2 SJ24.2 U24.1